# Altium PCB PCB1.PcbDoc
Units mil, origin at the board's own origin, x right, y up, seen from the top; angles counter-clockwise.
Board outline 1584.65 x 1112.2 mil, 2 copper layers (Top Layer, Bottom Layer); 34 components, 37 nets, 121 pads, 14 vias.
Unrouted connection lines stored in the file: 2.
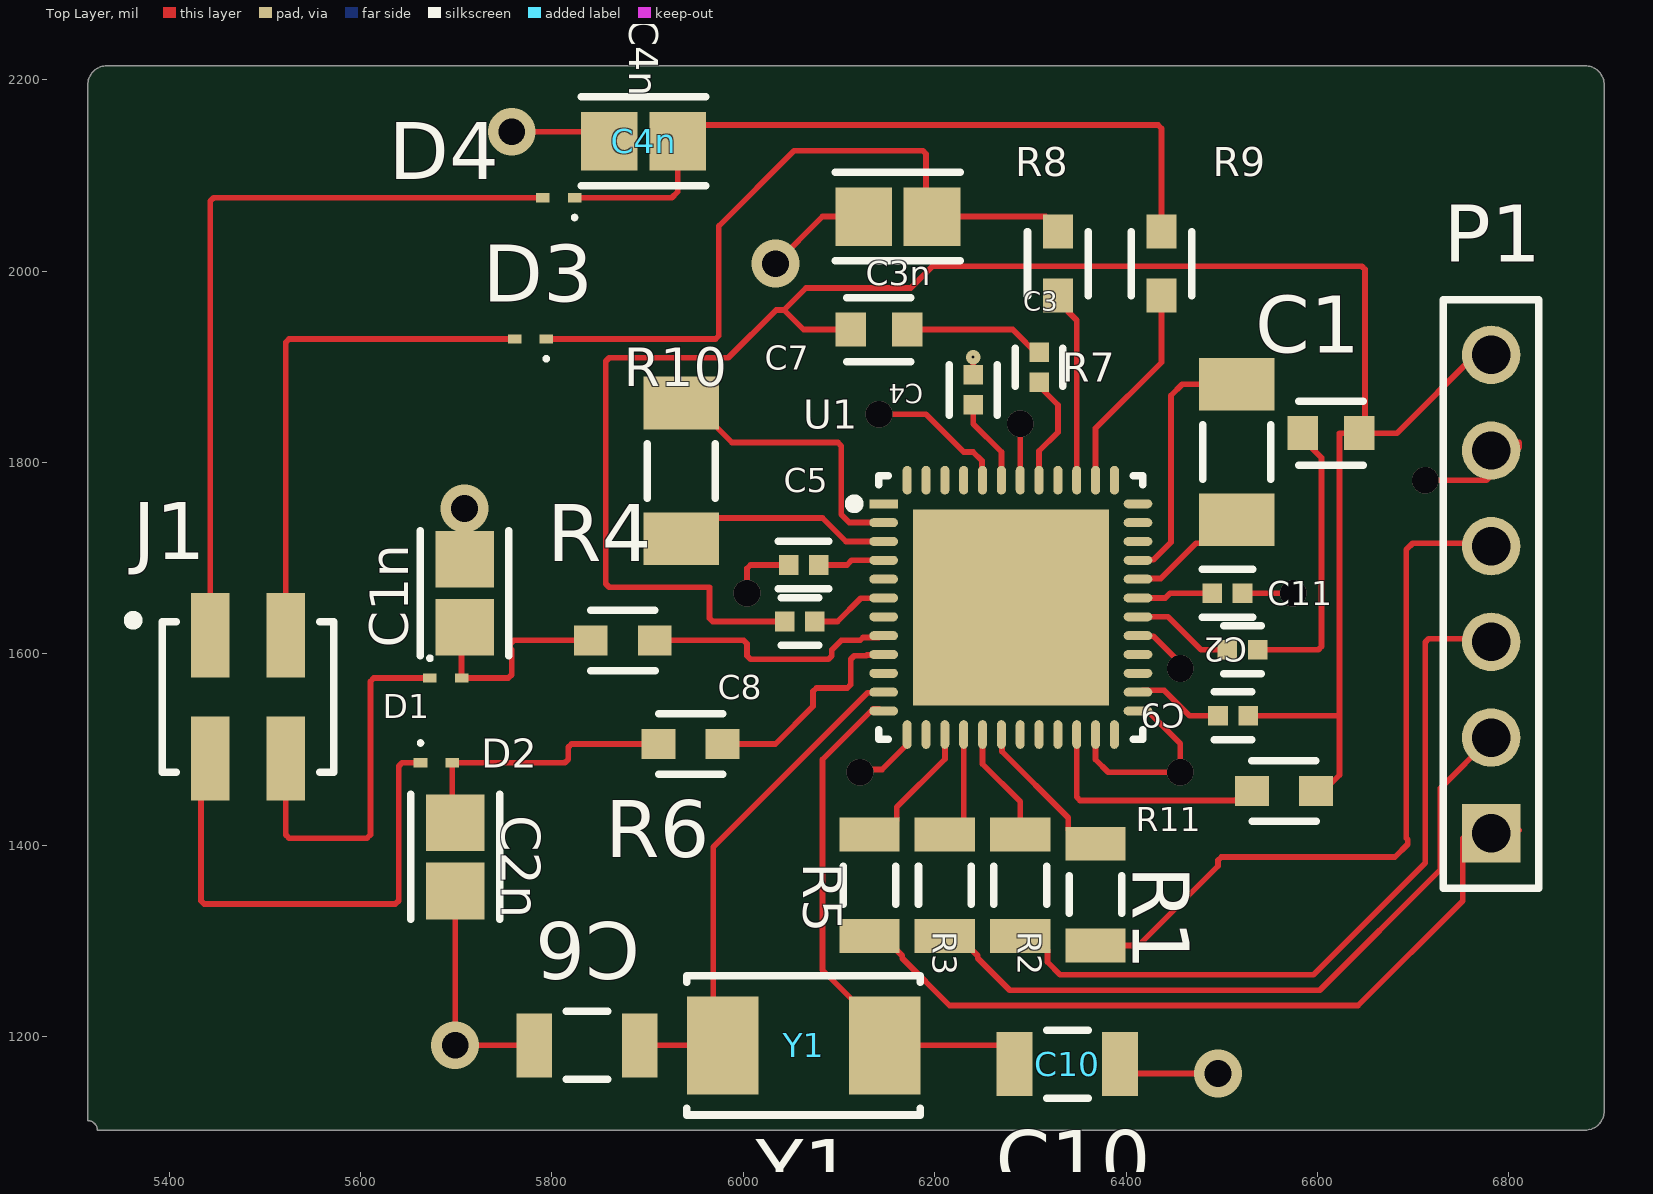
[diagram p0: Top Layer view]
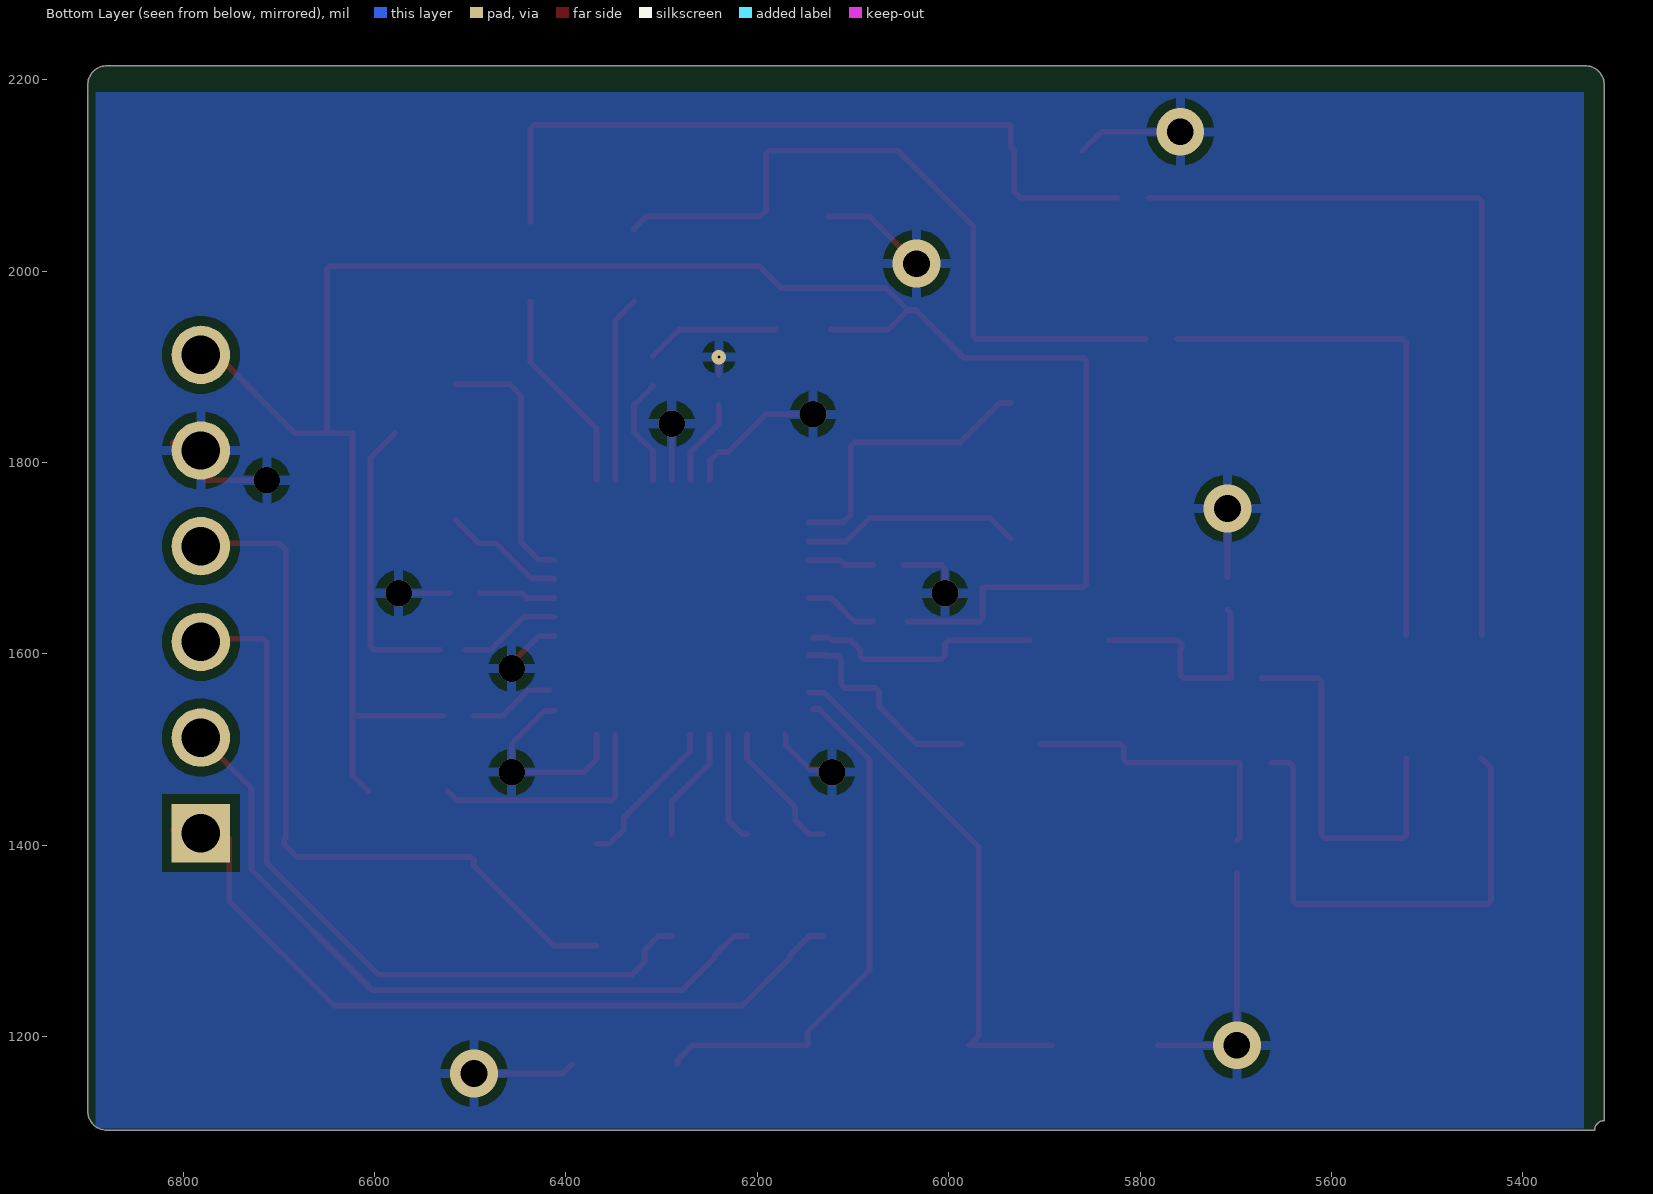
[diagram p1: Bottom Layer view, seen from below]
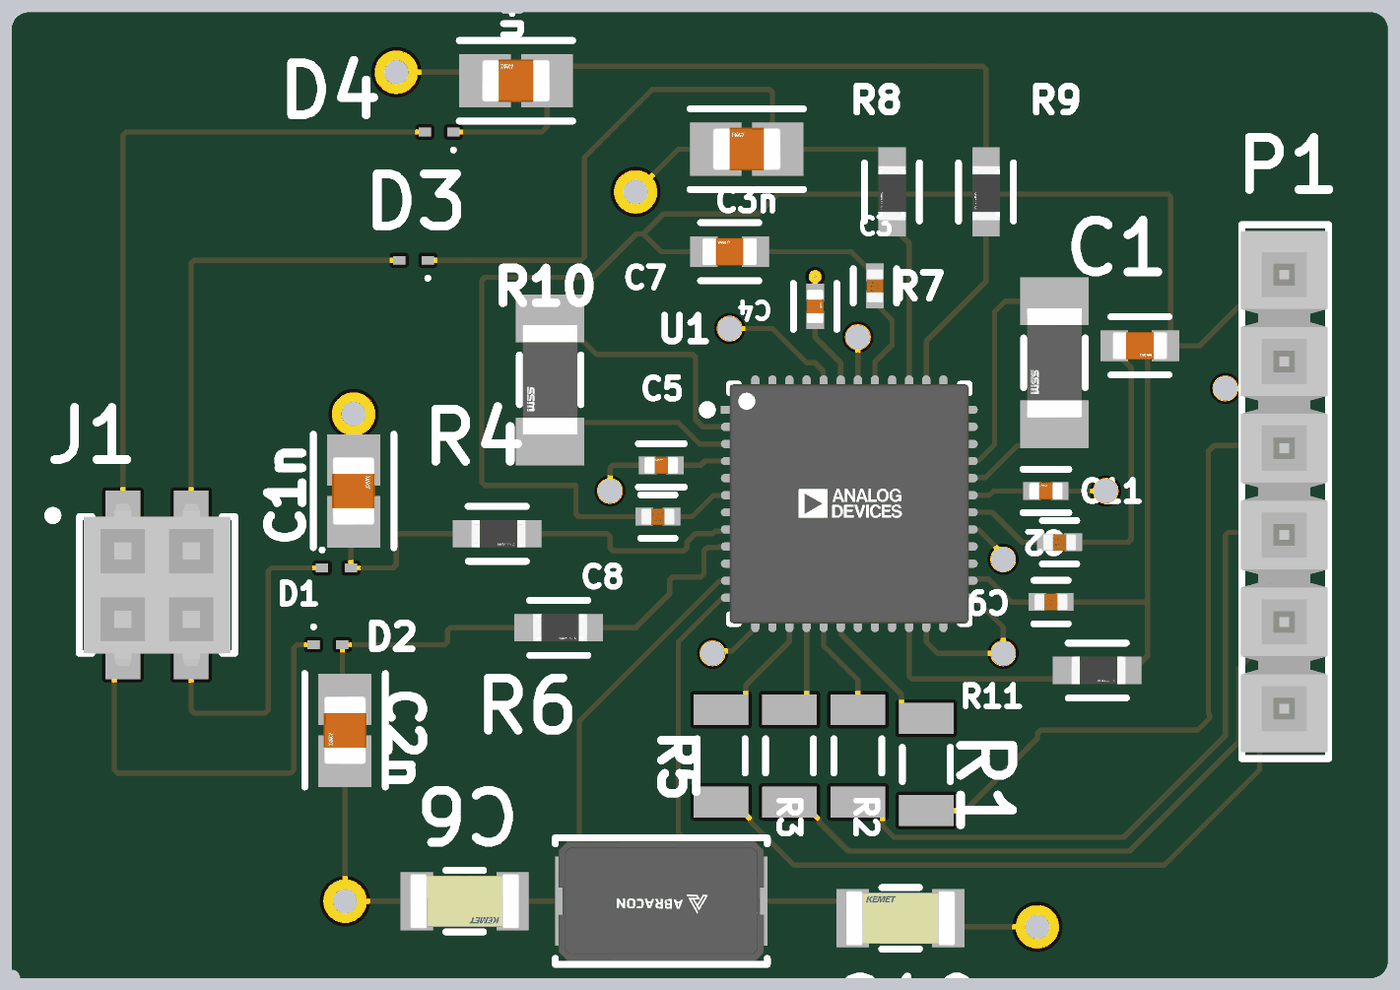
[diagram p2: 3D render of the assembled board from above, using the file's embedded part models]

## Layer stack, top to bottom
Top Solder: solder mask 0.4, Solder Resist, Dk 3.5
Top Layer: signal copper 1.4
Dielectric 1: dielectric 12.6, FR-4, Dk 4.8
Bottom Layer: signal copper 1.4
Bottom Solder: solder mask 0.4, Solder Resist, Dk 3.5

## Board outline
5314.96,1112.2 cw(c5314.96,1102.36) 5324.8,1102.36 6879.92,1102.36 ccw(c6879.92,1122.05) 6899.61,1122.05 6899.61,2194.88 ccw(c6879.92,2194.88) 6879.92,2214.57 5334.65,2214.57 ccw(c5334.65,2194.88) 5314.96,2194.88

## Design rules (kind name [scope] priority, off if disabled: settings)
Clearance [All] p1: gap=10 ignorepadtopadclearanceinfootprint=FALSE
PolygonConnect [All] p1: connectstyle=Relief reliefconductorwidth=10 reliefentries=4 polygonreliefangle="90 Angle" airgapwidth=10
RoutingVias [All] p1: holewidth=28 width=50 viastyle="Through Hole" minholewidth=28 minwidth=50 maxholewidth=28 maxwidth=50
SolderMaskExpansion [All] p1: expansion=4 istentingtop=FALSE
SupplyNets "Schematic Supply Nets_2" [InNet('3v3')] p1: voltage=0.000
SupplyNets "Schematic Supply Nets" [InNet('GND')] p2: voltage=0.000
Width [All] p1: maxlimit=10 minlimit=6 preferedwidth=8
30 further rules are at their usual default settings.

## Components (designator, comment, footprint, x,y, rotation, side; value= is the part's Value field where it differs from the comment)
C1 "10uF" FP-CC0603-DB-MFG 6614.17,1830.71 r180 top
C1n "1nF" FP-0805-L_2_01_0_2-W_1_25-IPC_A 5708.66,1663.39 r90 top
C2 ".1uF" FP-C0402-BB-MFG 6521.65,1604.33 r180 top value="0.10 μF"
C2n "1nF" FP-0805-L_2_01_0_2-W_1_25-IPC_A 5698.82,1387.8 r270 top
C3 ".1uF" FP-C0402-BB-MFG 6309.06,1899.61 r90 top value="0.10 μF"
C3n "1nF" FP-0805-L_2_01_0_2-W_1_25-IPC_A 6161.42,2057.09 r180 top
C4 "1uF" FP-C0402C105K8PACTU-MFG 6240.16,1875.98 r90 top
C4n "1nF" FP-0805-L_2_01_0_2-W_1_25-IPC_A 5895.67,2135.83 r180 top
C5 "1uF" FP-C0402C105K8PACTU-MFG 6062.99,1692.91 r180 top
C6 "22pF" FP-C1206C-EB-MFG 5836.61,1190.94 r180 top value="22 pF"
C7 "10uF" FP-CC0603-DB-MFG 6141.73,1938.98 r0 top
C8 ".1uF" FP-C0402-BB-MFG 6059.06,1633.86 r0 top value="0.10 μF"
C9 ".1uF" FP-C0402-BB-MFG 6511.81,1535.43 r180 top value="0.10 μF"
C10 "22pF" FP-C1206C-EB-MFG 6338.58,1171.26 r0 top value="22 pF"
C11 "1uF" FP-C0402C105K8PACTU-MFG 6505.91,1663.39 r180 top
D1 "TVS Diode" ONSC-SOD-923-2-514AB-01_V 5688.98,1574.8 r0 top
D2 "TVS Diode" ONSC-SOD-923-2-514AB-01_V 5679.13,1486.22 r0 top
D3 "TVS Diode" ONSC-SOD-923-2-514AB-01_V 5777.56,1929.13 r180 top
D4 "TVS Diode" ONSC-SOD-923-2-514AB-01_V 5807.09,2076.77 r180 top
J1 "SQW-102-01-F-D-VS" SMTC-SQW-102-01-X-D-VS 5482.28,1555.12 r0 top
P1 "TSW-106-07-L-S" SMTC-TSW-106-07-X-S 6781.5,1412.6 r90 top
R1 "22Ω" RESC3216X60X45LL10T20 6368.11,1348.43 r270 top
R2 "22Ω" RESC3216X60X45LL10T20 6289.37,1358.27 r270 top
R3 "22Ω" RESC3216X60X45LL10T20 6210.63,1358.27 r270 top
R4 "10kΩ" FP-RT0603-MFG 5873.98,1614.17 r0 top value=10KΩ
R5 "22Ω" RESC3216X60X45LL10T20 6131.89,1358.27 r270 top
R6 "10kΩ" FP-RT0603-MFG 5944.88,1505.91 r0 top value=10KΩ
R7 "1kΩ" FP-RG3216-MFG 6515.75,1811.02 r270 top
R8 "10kΩ" FP-RT0603-MFG 6328.74,2007.87 r270 top value=10KΩ
R9 "10kΩ" FP-RT0603-MFG 6437.01,2007.87 r270 top value=10KΩ
R10 "1kΩ" FP-RG3216-MFG 5935.04,1791.34 r270 top
R11 "10kΩ" FP-RT0603-MFG 6564.96,1456.69 r0 top value=10KΩ
U1 "AD5941BCPZ-RL7" FP-CP-48-4-IPC_C 6279.53,1648.64 r0 top
Y1 "Crystal 16MHz" FP-ABM7-MFG 6062.99,1190.94 r180 top

## Footprints (in the part's own frame and the unit in brackets; to place one, negate y for a bottom-side part, rotate by r counter-clockwise, add the part's x,y. Pads: shape width x height; smd on the part's side, far side on the other; paste and mask are expansions set on the pad)
FP-0805-L_2_01_0_2-W_1_25-IPC_A [mil]
  rect 59.24x61.27 smd paste+0 mask+0: 1(-35.66,0) 2(35.66,0)
  silkscreen extent -65,-46 65,46, body extent -85,-50 85,50, height 10
FP-ABM7-MFG [mm]
  rect 1.9x2.6 smd paste+0 mask+0: 1(-2.15,0) 2(2.15,0)
  silkscreen extent -3.1,-1.85 3.1,1.85, body extent -3.2,-1.95 3.2,1.95, height 0.25
FP-C0402-BB-MFG [mm]
  rect 0.52x0.52 smd paste+0 mask+0: 1(-0.4,0) 2(0.4,0)
  silkscreen extent -0.5,-0.64 0.5,0.64, body extent -0.8,-0.4 0.8,0.4, height 0.25
FP-C0402C105K8PACTU-MFG [mm]
  rect 0.52x0.52 smd paste+0 mask+0: 1(-0.4,0) 2(0.4,0)
  silkscreen extent -0.67,-0.64 0.67,0.64, body extent -0.8,-0.4 0.8,0.4, height 0.25
FP-C1206C-EB-MFG [mm]
  rect 0.95x1.7 smd paste+0 mask+0: 1(-1.4,0) 2(1.4,0)
  silkscreen extent -0.55,-0.9 0.55,0.9, body extent -2,-1 2,1, height 0.25
FP-CC0603-DB-MFG [mm]
  rect 0.8x0.9 smd paste+0 mask+0: 1(-0.75,0) 2(0.75,0)
  silkscreen extent -0.85,-0.85 0.85,0.85, body extent -1.43,-0.82 1.43,0.82, height 0.25
FP-CP-48-4-IPC_C [mm]
  rect 0.761x0.239 smd paste+0 mask+0: 1(-3.376,2.75)
  rrect100% 0.761x0.239 smd paste+0 mask+0: 2(-3.376,2.25) 3(-3.376,1.75) 4(-3.376,1.25) 5(-3.376,0.75) 6(-3.376,0.25) 7(-3.376,-0.25) 8(-3.376,-0.75) 9(-3.376,-1.25) 10(-3.376,-1.75) 11(-3.376,-2.25) 12(-3.376,-2.75) 25(3.376,-2.75) 26(3.376,-2.25) 27(3.376,-1.75) 28(3.376,-1.25) 29(3.376,-0.75) 31(3.376,0.25) 32(3.376,0.75) 33(3.376,1.25) 34(3.376,1.75) 35(3.376,2.25) 36(3.376,2.75) ""(3.376,-0.25)
  rrect100% 0.239x0.761 smd paste+0 mask+0: 13(-2.75,-3.376) 14(-2.25,-3.376) 15(-1.75,-3.376) 16(-1.25,-3.376) 17(-0.75,-3.376) 18(-0.25,-3.376) 19(0.25,-3.376) 20(0.75,-3.376) 21(1.25,-3.376) 22(1.75,-3.376) 23(2.25,-3.376) 24(2.75,-3.376) 37(2.75,3.376) 38(2.25,3.376) 39(1.75,3.376) 40(1.25,3.376) 41(0.75,3.376) 42(0.25,3.376) 43(-0.25,3.376) 44(-0.75,3.376) 45(-1.25,3.376) 46(-1.75,3.376) 47(-2.25,3.376) 48(-2.75,3.376)
  rect 5.2x5.2 smd paste-1000 mask+0: 49(0,0)
  silkscreen extent -4.28,-3.5 3.5,3.5, body extent -3.86,-3.86 3.86,3.86, height 0.25
FP-RG3216-MFG [mm]
  rect 1.4x2 smd paste+0 mask+0: 1(-1.8,0) 2(1.8,0)
  silkscreen extent -0.72,-0.9 0.72,0.9, body extent -2.6,-1.1 2.6,1.1, height 0.25
FP-RT0603-MFG [mm]
  rect 0.9x0.8 smd paste+0 mask+0: 1(-0.85,0) 2(0.85,0)
  silkscreen extent -0.85,-0.81 0.86,0.8, body extent -1.4,-0.55 1.4,0.55, height 0.25
ONSC-SOD-923-2-514AB-01_V [mm] "SOD, 2-Leads, Body 0.8x0.6mm"
  rect 0.36x0.25 smd: 1(-0.42,0) 2(0.42,0)
  silkscreen extent -0.47,0.48 -0.37,0.57, body extent -0.4,-0.3 0.4,0.3, height 0.4
RESC3216X60X45LL10T20 [mm] "Chip Resistor, 2-Leads, Body 3.20x1.60mm, IPC High Density"
  rect 0.9x1.6 smd: 1(-1.35,0) 2(1.35,0)
  silkscreen extent -0.5,-0.7 0.5,0.7, body extent -1.65,-0.85 1.65,0.85, height 0.6
SMTC-SQW-102-01-X-D-VS [mm] "Socket Strip Assembly, 2x2 Pins, Vertical, 2mm Pitch, Female"
  rect 1.016x2.24 smd: 1(-1,1.635) 2(-1,-1.635) 3(1,1.635) 4(1,-1.635)
  silkscreen extent -3.17,-2 2.27,2.16, body extent -2.15,-2.37 2.15,2.37, height 7.62
SMTC-TSW-106-07-X-S [mm] ".025 SQ Post Terminal Strip Assembly, 1x6 Pins, Vertical, 2.54mm Pitch, Male"
  rect 1.55x1.55 hole 1.02: 1(0,0)
  round 1.55 hole 1.02: 2(2.54,0) 3(5.08,0) 4(7.62,0) 5(10.16,0) 6(12.7,0)
  silkscreen extent -1.46,-1.27 14.16,1.27, body extent -1.27,-1.24 13.97,1.3, height 8.38

## Part data
C1 C7: library part CMP-1035-02797-2, "CAP CER 10UF 6.3V X5R 0603", Case Code (Imperial)=0603, Case Code (Metric)=1608, Dielectric=X5R, Max Operating Temperature=85°C, Min Operating Temperature=-55°C, Package Quantity=4000, Resistor Type=Ceramic, Tolerance=20%, Voltage Rating=6.3V, Capacitance=10uF, Case/Package=0603, Construction=Flat, Depth=0.8mm, Dissipation Factor=10%, Halogen Free="Halogen Free", Height=0.8mm, Lead Free="Lead Free", Length=1.6mm, Mount="Surface Mount", Number of Pins=2, Packaging="Tape and Reel", Radiation Hardening=No, REACH SVHC="No SVHC", RoHS Compliant=Yes, Series=CC, Termination=SMD/SMT, Thickness=0.039inch, Voltage Rating (DC)=6.3V, Width=0.031inch
C1n C2n C3n C4n: library part CMP-2007-04595-2, "General Purpose Ceramic Capacitor, 0805, 1nF, 10%, X7R, 0.15, 200V", Case Code (Imperial)=0805, Case Code (Metric)=2012, Dielectric=X7R, Dielectric Material=Ceramic, Insulation Resistance=100GR, Max Operating Temperature=125°C, Min Operating Temperature=-55°C, Package Quantity=1, Tolerance=10%, Voltage=200V, Capacitance=1nF, Case/Package=0805, Construction=Flat, Contact Plating=Tin, Depth=1.25mm, Height=0.71mm, Lead Free="Lead Free", Length=2.01mm, Mount="Surface Mount", Number of Pins=2, Packaging="Tape and Reel", Radiation Hardening=No, REACH SVHC="No SVHC", RoHS Compliant=Yes, Series=-, Size=0.94mm, Termination=SMD/SMT, Thickness=0.037inch, Voltage Rating=200V, Voltage Rating (DC)=200V, Width=0.049inch
C2 C3 C8 C9: library part CMP-2008-02046-2, "CAP CER 0.1UF 10V X5R 0402", Capacitance="0.10 μF", Manufacturer=Kemet, Manufacturer Part Number=C0402C104K8PACTU, Package=C0402-BB, Temperature="-55°C to +125°C", Temperature Characteristic=X5R, Temperature Coefficient=15%, Temperature Range High=+125°C, Temperature Range Low=-55°C, Tolerance=0.1, Voltage Rating="10 V", Automotive=No, Category=Cap, ComponentLink2Description=Datasheet, ComponentLink2URL=https://content.kemet.com/datasheets/KEM_C1002_X7R_SMD.pdf, Device Class L1="Passive Components", Device Class L2=Capacitors, Device Class L3="Ceramic Capacitors", Digikey Description="CAP CER 0.1UF 10V X5R 0402", Height=0.55mm, Ipc Land Pattern Name=CAPC10050X50, Lead Free=Yes, Material=Ceramic, Mouser Description="Capacitor 100 nF 10 VDC 0402", Octopart=https://octopart.com/c0402c104k8pactu-kemet-140039, RoHS=TRUE
C4 C5 C11: library part CMP-2008-02081-2, "CAP CER 1UF 10V X5R 0402", Case Code (Imperial)=0402, Case Code (Metric)=1005, Dielectric=X5R, Dielectric Material=Ceramic, Max Operating Temperature=85°C, Min Operating Temperature=-55°C, Package Quantity=1, Tolerance=10%, Voltage=10V, Capacitance=1uF, Case/Package=0402, Construction=Flat, Contact Plating=Tin, Depth=0.5mm, Dissipation Factor=5%, Height=0.5mm, Lead Free="Lead Free", Length=1mm, Mount="Surface Mount", Number of Pins=2, Packaging="Tape and Reel", Radiation Hardening=No, REACH SVHC="No SVHC", RoHS Compliant=Yes, Series=C, Termination=SMD/SMT, Thickness=0.022inch, Voltage Rating=10V, Voltage Rating (DC)=10V, Width=0.5mm
C6 C10: library part CMP-1037-00978-2, "1206 22pF Ceramic Multilayer Capacitor; 50VDC; 125degC; C0G Dielec; +/-5% SMD", Capacitance="22 pF", Manufacturer=KEMET, Manufacturer Part Number=C1206C220J5GACTU, Package=C1206C-EB, Temperature="-55°C to +150°C", Temperature Characteristic=C0G, Temperature Coefficient=15%, Temperature Range High=+150°C, Temperature Range Low=-55°C, Tolerance=0.05, Voltage Rating="50 V", Automotive=Yes, Automotive Grade="Grade 0", Category=Cap, ComponentLink2Description=Datasheet, ComponentLink2URL=https://content.kemet.com/datasheets/KEM_C1007_X8R_ULTRA_150C_SMD.pdf, Device Class L1="Passive Components", Device Class L2=Capacitors, Device Class L3="Ceramic Capacitors", Digikey Description="1206 22pF Ceramic Multilayer Capacitor; 50VDC; 125degC; C0G Dielec; +/-5% SMD", Height=0.88mm, Ipc Land Pattern Name=CAPC320160X78, Lead Free=Yes, Material=Ceramic, Mouser Description="1206 22pF Ceramic Multilayer Capacitor; 50VDC; 125degC; C0G Dielec; +/-5% SMD", Octopart=https://octopart.com/c1206c220j5gactu-kemet-131912, RoHS=TRUE
D1 D2 D3 D4: library part CMP-1063-00117-1, "Transient Voltage Suppressor, ESD Protection Diode with Ultra-Low Leakage, 2-Pin SOD-923, Pb-Free, Tape and Reel", Manufacturer="On Semiconductor", PartNumber=ESD9R3.3ST5G, C Max (pF)=0.9, ComponentLink1Description="Manufacturer URL", ComponentLink1URL=http://www.onsemi.com/, ComponentLink2Description=Datasheet, ComponentLink2URL=http://www.onsemi.com/pub_link/Collateral/ESD9R3.3S-D.PDF, ComponentLink3Description="Package Specification", ComponentLink3URL=http://www.onsemi.com/pub_link/Collateral/514AB.PDF, DatasheetVersion="Rev. 1", Direction=Unidirectional, IR Max (uA)=0.001, Mounting Technology="Surface Mount", Number of Lines=1, PackageDescription="2-Pin SOD, Body 0.8 x 0.6 mm", PackageReference=SOD-923-2-514AB-01, PackageVersion="Rev. C, 03/2011", Packing="Tape and Reel", RoHS=Pb-Free, V(BR) Min (V)=4.8, VRWM Max (V)=3.3
J1: library part CMP-1021-00107-1, "Cost-Effective Rugged Socket, Surface Mount, Vertical, -55 to 125 degC, 2 mm Pitch, 4-Pin, Female, RoHS", Manufacturer=Samtec, Temperature Range="-55 to 125 degC", ComponentLink1Description="Manufacturer URL", ComponentLink1URL=http://www.samtec.com, ComponentLink2Description=Datasheet, ComponentLink2URL=http://www.samtec.com/documents/webfiles/pdf/SQW.PDF, ComponentLink3Description="Package Specification", ComponentLink3URL=http://www.samtec.com/documents/webfiles/cpdf/SQW-1XX-01-XXX-D-VS-XX-XXX-MKT.pdf, DatasheetVersion=F-214, Mounting Technology="Surface Mount", Orientation=Vertical, PackageDescription="2mm Sockets Trip Assembly", PackageReference=SQW-102-01-X-D-VS, PackageVersion="AI, 4/1997", PartNumber=SQW-102-01-F-D-VS, Pitch="2 mm", RoHS=True
P1: library part CMP-1024-00386-1, "0.025\" SQ Post Header, Through-hole, Vertical, -55 to 125 degC, 2.54 mm Pitch, 6-Pin, Male, RoHS", Manufacturer=Samtec, Temperature Range="-55 to 125 degC", ComponentLink1Description="Manufacturer URL", ComponentLink1URL=http://www.samtec.com, ComponentLink2Description=Datasheet, ComponentLink2URL=http://www.samtec.com/documents/webfiles/pdf/TSW_TH.PDF, ComponentLink3Description="Package Specification", ComponentLink3URL=http://www.samtec.com/documents/webfiles/cpdf/TSW-XXX-XX-XXX-X-XX-XXX-MKT.pdf, DatasheetVersion=F-214, Mounting Technology=Through-hole, Orientation=Vertical, PackageDescription=".025[0.64] SQ. Post Terminal Strip Assembly", PackageReference=TSW-106-07-X-S, PackageVersion="DM, 8/1988", PartNumber=TSW-106-07-L-S, Pitch="2.54 mm", RoHS=True
R1 R2 R3 R5: library part CMP-1014-00034-2, Manufacturer="Vishay Dale", Part Number=CRCW120622R0JNEA
R4 R6 R8 R9 R11: library part CMP-03412-005349-1, "RES SMD 10K OHM 1% 1/10W 0603", Manufacturer=Yageo, Manufacturer Part Number=RT0603FRE0710KL, Package=RT0603, Power Rating=0.1W, Resistance=10KΩ, Temperature="-55°C to +155°C", Temperature Coefficient="50 ppm/°C", Temperature Range High=+155°C, Temperature Range Low=-55°C, Tolerance=0.01, Voltage Rating=75V, Automotive=No, Category=Res, ComponentLink2Description=Datasheet, ComponentLink2URL=http://www.yageo.com/documents/recent/PYu-RT_1-to-0.01_RoHS_L_9.pdf, Composition="Thin Film", Device Class L1="Passive Components", Device Class L2=Resistors, Device Class L3="Chip SMD Resistors", Digikey Description="RES SMD 10K OHM 1% 1/10W 0603", Footprint Url=http://www.yageo.com/exep/pages/download/literatures/PYu-R_Mount_10.pdf, Height=0.55mm, Ipc Land Pattern Name=RESC16080X45, Lead Free=Yes, Mouser Description="Thin Film Resistors - SMD 10K ohm 1% 1/10W", Octopart=https://octopart.com/rt0603fre0710kl-yageo-40009243, RoHS=TRUE, Series=RT
R7 R10: library part CMP-2003-02638-2, "Automotive Metal Thin Film Chip Resistor, 1206, 1kΩ, 0.1%, 25ppm/°C, 0.25W, 200V", Case Code (Imperial)=1206, Case Code (Metric)=3216, Max Operating Temperature=155°C, Max Power Dissipation=250mW, Min Operating Temperature=-55°C, Resistance=1kR, Resistor Type="Thin Film", Temperature Coefficient=25ppm/°C, Tolerance=0.1%, Voltage Rating=200V, Case/Package=1206, Features="Automotive AEC-Q200", Height=0.4mm, Lead Free="Lead Free", Length=3.2mm, Number of Terminations=2, Packaging="Tape and Reel", Power Rating=250mW, RoHS Compliant=Yes, Series=RG, Size Code=1206, Termination=SMD/SMT, Voltage Rating (DC)=200V, Weight=0.000571oz, Width=1.6mm
U1: library part CMP-09085-000008-1, "BIO-IMPEDANCE & ELECTROCHEMICAL", RoHS Compliant=Yes
Y1: library part CMP-27762-000095-1, "Crystal 16MHz ±20ppm 18pF SMD-2 6mm x 3.5mm", Case/Package=CSMD, ESR (Equivalent Series Resistance)=50R, Frequency=16MHz, Frequency Stability=30ppm, Frequency Tolerance=20ppm, Load Capacitance=18pF, Max Operating Temperature=85°C, Min Operating Temperature=-40°C, Operating Frequency="16 MHz", Package Quantity=1000, Resistor Type=Ceramic, Depth=3.5mm, Height=0.055inch, Lead Free="Lead Free", Length=6mm, Mount="Surface Mount", Number of Pins=2, Packaging="Tape and Reel", Radiation Hardening=No, Series=ABM7, Termination=SMD/SMT, Tolerance=20ppm, Width=3.3mm

## Via types
v1: diameter 28, hole 28, Top Layer to Bottom Layer, 8 vias
v2: diameter 50, hole 28, Top Layer to Bottom Layer, 5 vias
v3: diameter 15, hole 3, Top Layer to Bottom Layer, 1 vias

## Nets (pads, with @x,y where several pads share a name; then routed paths per layer and width w, separated by ;. In a path a pad name is that pad's centre, name@x,y a point inside that pad or via, vN(x,y) a via of type N, cw(c..) or ccw(c..) an arc to the next point about the centre after c; other vN are vias at no path point)
3V3: C1.1 C7.1 C8.1 C9.1 P1.6 R11.2 | length 2207.8
  Top Layer w6: C8.1 5968.08,1633.86 5964.57,1637.37 5964.57,1669.71 5859.81,1669.71 5856.3,1673.23 5856.3,1905.93 5859.81,1909.45 5984.25,1909.45 6034.29,1959.49 6042.48,1959.49 ; C7.1@6122.98,1938.98 6062.99,1938.98 6042.48,1959.49 ; C9.1 6623.08,1535.43 ; R11.2@6606.33,1456.69 6623.08,1473.44 6623.08,1535.43 ; P1.6@6768.11,1915.75 6683.07,1830.71 C1.1@6649.64,1830.71 ; 6042.48,1959.49 6065.36,1982.37 6174.87,1982.37 6197.75,2005.25 6646.32,2005.25 6647.62,2003.95 6649.64,2001.94 C1.1@6649.64,1830.71 ; 6623.08,1535.43 6623.08,1540.4 6623.08,1830.71 C1.1@6649.64,1830.71
GND: C1n.2 C2n.2 C3n.2 C4.2 C4n.2 C5.2 C6.2 C10.2 C11.1 P1.5 U1.13 U1.23 U1.25 U1.29 U1.42 U1.44 | length 1485.1
  Top Layer w6: C2n.2@5698.82,1370.92 v2(5698.82,1190.94) C6.2 ; C1n.2@5708.66,1680.26 v2(5708.66,1751.97) ; v2(5757.87,2145.67) 5840.32,2145.67 C4n.2@5860.01,2125.98 ; v1(6003.94,1663.39) 6003.94,1689.4 6007.45,1692.91 C5.2 ; v2(6033.46,2007.87) 6082.68,2057.09 C3n.2 ; v1(6122.05,1476.38) 6124.93,1479.26 6145.05,1479.26 6170.14,1504.36 6170.14,1514.63 U1.13 ; v1(6141.73,1850.39) 6190.94,1850.39 6230.31,1811.02 6240.16,1811.02 6249.35,1801.84 6249.35,1782.19 U1.44 ; C4.2 v3(6240.16,1910.22) ; U1.42 v1(6289.37,1840.55) ; U1.23 6368.11,1489.74 6381.47,1476.38 v1(6456.69,1476.38) 6456.69,1506.38 6422.69,1540.38 U1.25 ; C10.2 6403.54,1161.42 v2(6496.06,1161.42) v2@6487.65,1169.83 ; U1.29 6413.08,1618.46 6428.71,1618.46 6456.69,1590.48 v1(6456.69,1584.65) ; C11.1 v1(6574.8,1663.39) ; v1(6712.6,1781.5) 6776.77,1781.5 6811.02,1815.75 6811.02,1820.87
NetC1_2: C1.2 C2.1 | length 307.8
  Top Layer w6: C2.1@6531.5,1604.33 6600.82,1604.33 6604.33,1607.85 6604.33,1805.09 C1.2@6578.71,1830.71
NetC1n_1: C1n.1 D1.2 R4.1 | length 237.3
  Top Layer w6: C1n.1@5708.66,1646.51 5705.51,1643.36 D1.2 5754.36,1574.8 5757.87,1578.32 5757.87,1604.33 5756.52,1605.69 5756.52,1610.66 5760.03,1614.17 R4.1@5832.61,1614.17
NetC2_2: C2.2 | length 107.8
  Top Layer w6: 6412.42,1638.8 6443.91,1638.8 6478.38,1604.33 C2.2
NetC2n_1: C2n.1 D2.2 R6.1 | length 306.3
  Top Layer w6: C2n.1@5698.82,1404.67 5695.67,1407.82 D2.2 5813.41,1486.22 5816.93,1489.74 5816.93,1502.39 5820.44,1505.91 R6.1@5903.51,1505.91
NetC3_1: C3.1 C7.2
NetC3_2: U1.41
NetC3n_1: C3n.1 D3.1 R8.1 | length 752.8
  Top Layer w6: D3.1 5970.89,1929.13 5974.41,1932.65 5974.41,2047.24 6053.15,2125.98 6187.43,2125.98 6190.94,2122.47 6190.94,2063.22 C3n.1 6315.99,2057.09 6328.74,2044.34 R8.1@6328.74,2043.34
NetC4_1: C4.1 U1.43 | length 231.2
  Top Layer w6: 6180.17,1938.98 6281.5,1938.98 6309.06,1911.42 ; C4.1 6240.16,1840.55 6269.69,1811.02 U1.43
NetC4n_1: C4n.1 D4.1 R9.1 | length 782.5
  Top Layer w6: D4.1 5925.2,2076.77 5931.33,2082.9 5931.33,2125.98 5935.04,2129.69 5935.04,2152 5935.74,2152.7 6433.49,2152.7 6437.01,2149.18 R9.1@6437.01,2051.25
NetC5_1: C5.1 U1.4 | length 69.9
  Top Layer w6: C5.1 6108.23,1692.91 6113.18,1697.86 U1.4
NetC6_1: C6.1 U1.11 Y1.2 | length 543
  Top Layer w6: C6.1 Y1.2 5968.5,1200.79 5968.5,1398.08 6129.83,1559.41 6145.98,1559.41 U1.11
NetC8_2: C8.2 U1.6 | length 78.1
  Top Layer w6: C8.2@6078.74,1633.86 6098.39,1633.86 6122.65,1658.12 6146.26,1658.12 U1.6
NetC9_2: C9.2 U1.26 | length 89.8
  Top Layer w6: U1.26@6417.32,1562.04 6439.77,1562.04 6466.38,1535.43 C9.2
NetC10_1: C10.1 U1.12 Y1.1 | length 552.8
  Top Layer w6: U1.12@6141.73,1542.35 6135.4,1542.35 6082.68,1489.62 6082.68,1269.68 6147.64,1204.72 Y1.1 6267.76,1190.94 6283.46,1175.24 C10.1
NetC11_2: C11.2 U1.31 | length 79.8
  Top Layer w6: U1.31 6440.98,1658.49 6445.88,1663.39 C11.2
NetD1_1: D1.1 J1.4 | length 395.2
  Top Layer w6: J1.4 5521.65,1411 5525.17,1407.48 5606.72,1407.48 5610.24,1411 5610.24,1571.29 5613.75,1574.8 D1.1
NetD2_1: D2.1 J1.2 | length 527.2
  Top Layer w6: J1.2 5433.07,1480.91 5433.07,1342.1 5436.59,1338.58 5636.25,1338.58 5639.76,1342.1 5639.76,1482.71 5643.28,1486.22 D2.1
NetD3_2: D3.2 J1.3 | length 547
  Top Layer w6: J1.3 5521.65,1925.62 5525.17,1929.13 D3.2
NetD4_2: D4.2 J1.1 | length 802.9
  Top Layer w6: J1.1 5442.91,2073.26 5446.43,2076.77 D4.2
NetP1_1: P1.1 R5.2 | length 824.9
  Top Layer w6: R5.2 6145.67,1305.12 6166.13,1284.65 6166.13,1282.02 6215.59,1232.56 6642.43,1232.56 6751.97,1342.1 6751.97,1407.48 6760.24,1415.75 P1.1@6811.02,1415.75
NetP1_2: P1.2 R3.2 | length 754.9
  Top Layer w6: R3.2 6224.41,1305.12 6244.87,1284.65 6244.87,1282.02 6278.33,1248.56 6602.32,1248.56 6728.6,1374.84 6728.6,1459.7 P1.2
NetP1_3: P1.3 R2.2 | length 796.9
  Top Layer w6: R2.2 6303.15,1305.12 6317.87,1290.4 6317.87,1277.92 6331.23,1264.56 6595.69,1264.56 6712.6,1381.47 6712.6,1612.23 6716.11,1615.75 P1.3@6781.5,1615.75
NetP1_4: P1.4 R1.2 | length 773.4
  Top Layer w6: R1.2 6413.08,1295.28 6496.06,1378.26 6496.06,1384.28 6499.58,1387.8 6680.91,1387.8 6694.27,1401.15 6694.27,1406.12 6692.91,1407.48 6692.91,1709.08 6699.58,1715.75 P1.4@6781.5,1715.75
NetR1_1: R1.1 U1.18 | length 163
  Top Layer w6: U1.18 6270.34,1515.09 6270.34,1498.05 6339.61,1428.77 6339.61,1416.29 6354.33,1401.57 R1.1
NetR2_1: R2.1 U1.17 | length 120.6
  Top Layer w6: U1.17 6250,1485.03 6289.37,1445.66 R2.1
NetR3_1: R3.1 U1.16 | length 115.4
  Top Layer w6: R3.1 6215.6,1411.42 6230.31,1426.13 U1.16
NetR4_2: R4.2 U1.8 | length 255
  Top Layer w6: R4.2@5915.35,1614.17 6000.42,1614.17 6003.94,1610.66 6003.94,1598 6007.45,1594.49 6089,1594.49 6092.52,1598 6092.52,1604.33 6102.36,1614.17 6122.05,1614.17 6125.01,1617.14 U1.8@6141.73,1617.14
NetR5_1: R5.1 U1.15 | length 145
  Top Layer w6: R5.1 6145.67,1411.42 6160.39,1426.13 6160.39,1439.89 6210.63,1490.14 U1.15
NetR7_1: R7.1 U1.33 | length 269.4
  Top Layer w6: U1.33 6413.08,1698.51 6428.71,1698.51 6446.85,1716.65 6446.85,1870.08 6458.66,1881.89 R7.1
NetR7_2: R7.2 U1.32 | length 129
  Top Layer w6: U1.32 6413.08,1678.82 6436.27,1678.82 6473.05,1715.6 6491.19,1715.6 R7.2
NetR8_2: R8.2 U1.39 | length 195.1
  Top Layer w6: R8.2@6328.74,1968.5 6348.43,1948.82 U1.39
NetR9_2: R9.2 U1.38 | length 215.5
  Top Layer w6: U1.38 6368.11,1835.8 6437.01,1904.69 R9.2@6437.01,1968.5
NetR10_1: R10.1 U1.2 | length 305.4
  Top Layer w6: R10.1 5946.85,1862.2 5988.19,1820.87 6098.85,1820.87 6102.36,1817.35 6102.36,1745.64 6110.78,1737.23 U1.2
NetR10_2: R10.2 U1.3 | length 230.7
  Top Layer w6: R10.2 5956.69,1742.13 6082.68,1742.13 6107.26,1717.54 U1.3
NetR11_1: R11.1 U1.22 | length 246.1
  Top Layer w6: U1.22 6348.43,1450.37 6351.94,1446.85 6513.75,1446.85 R11.1@6523.59,1456.69
pads on no net: C3.2 R6.2 U1. U1.1 U1.5 U1.7 U1.9 U1.10 U1.14 U1.19 U1.20 U1.21 U1.24 U1.27 U1.28 U1.34 U1.35 U1.36 U1.37 U1.40 U1.45 U1.46 U1.47 U1.48 U1.49
copper on no net: | length 338.5
  Top Layer w6: 5986.25,1505.91 6033.46,1505.91 6072.83,1545.28 6072.83,1560.89 6076.35,1564.4 6108.71,1564.4 6112.2,1567.9 6112.2,1594.49 6115.89,1598.17 6128.67,1598.17 6129.28,1598.78 6145.98,1598.78 6146.63,1599.43 ; 6309.06,1781.54 6309.06,1812.05 6328.74,1831.73 6328.74,1860.24 6309.06,1879.92

## Polygon pours and split planes (outlines as drawn)
GND on Bottom Layer "GND_L02_P000" (solid, pour order 0): 5336.17,1104.17 5336.17,2186.84 6891.28,2186.84 6891.28,1104.17